# Altium PCB power-v3.1.PcbDoc (part 2 of 2)
Units mil, origin at the board's own origin, x right, y up, seen from the top; angles counter-clockwise.
Board outline 6120 x 3430.5 mil, 2 copper layers (Top Layer, Bottom Layer), stack 63.012 mil thick; 161 components, 68 nets, 413 pads, 6 vias.
Unrouted connection lines stored in the file: 242.
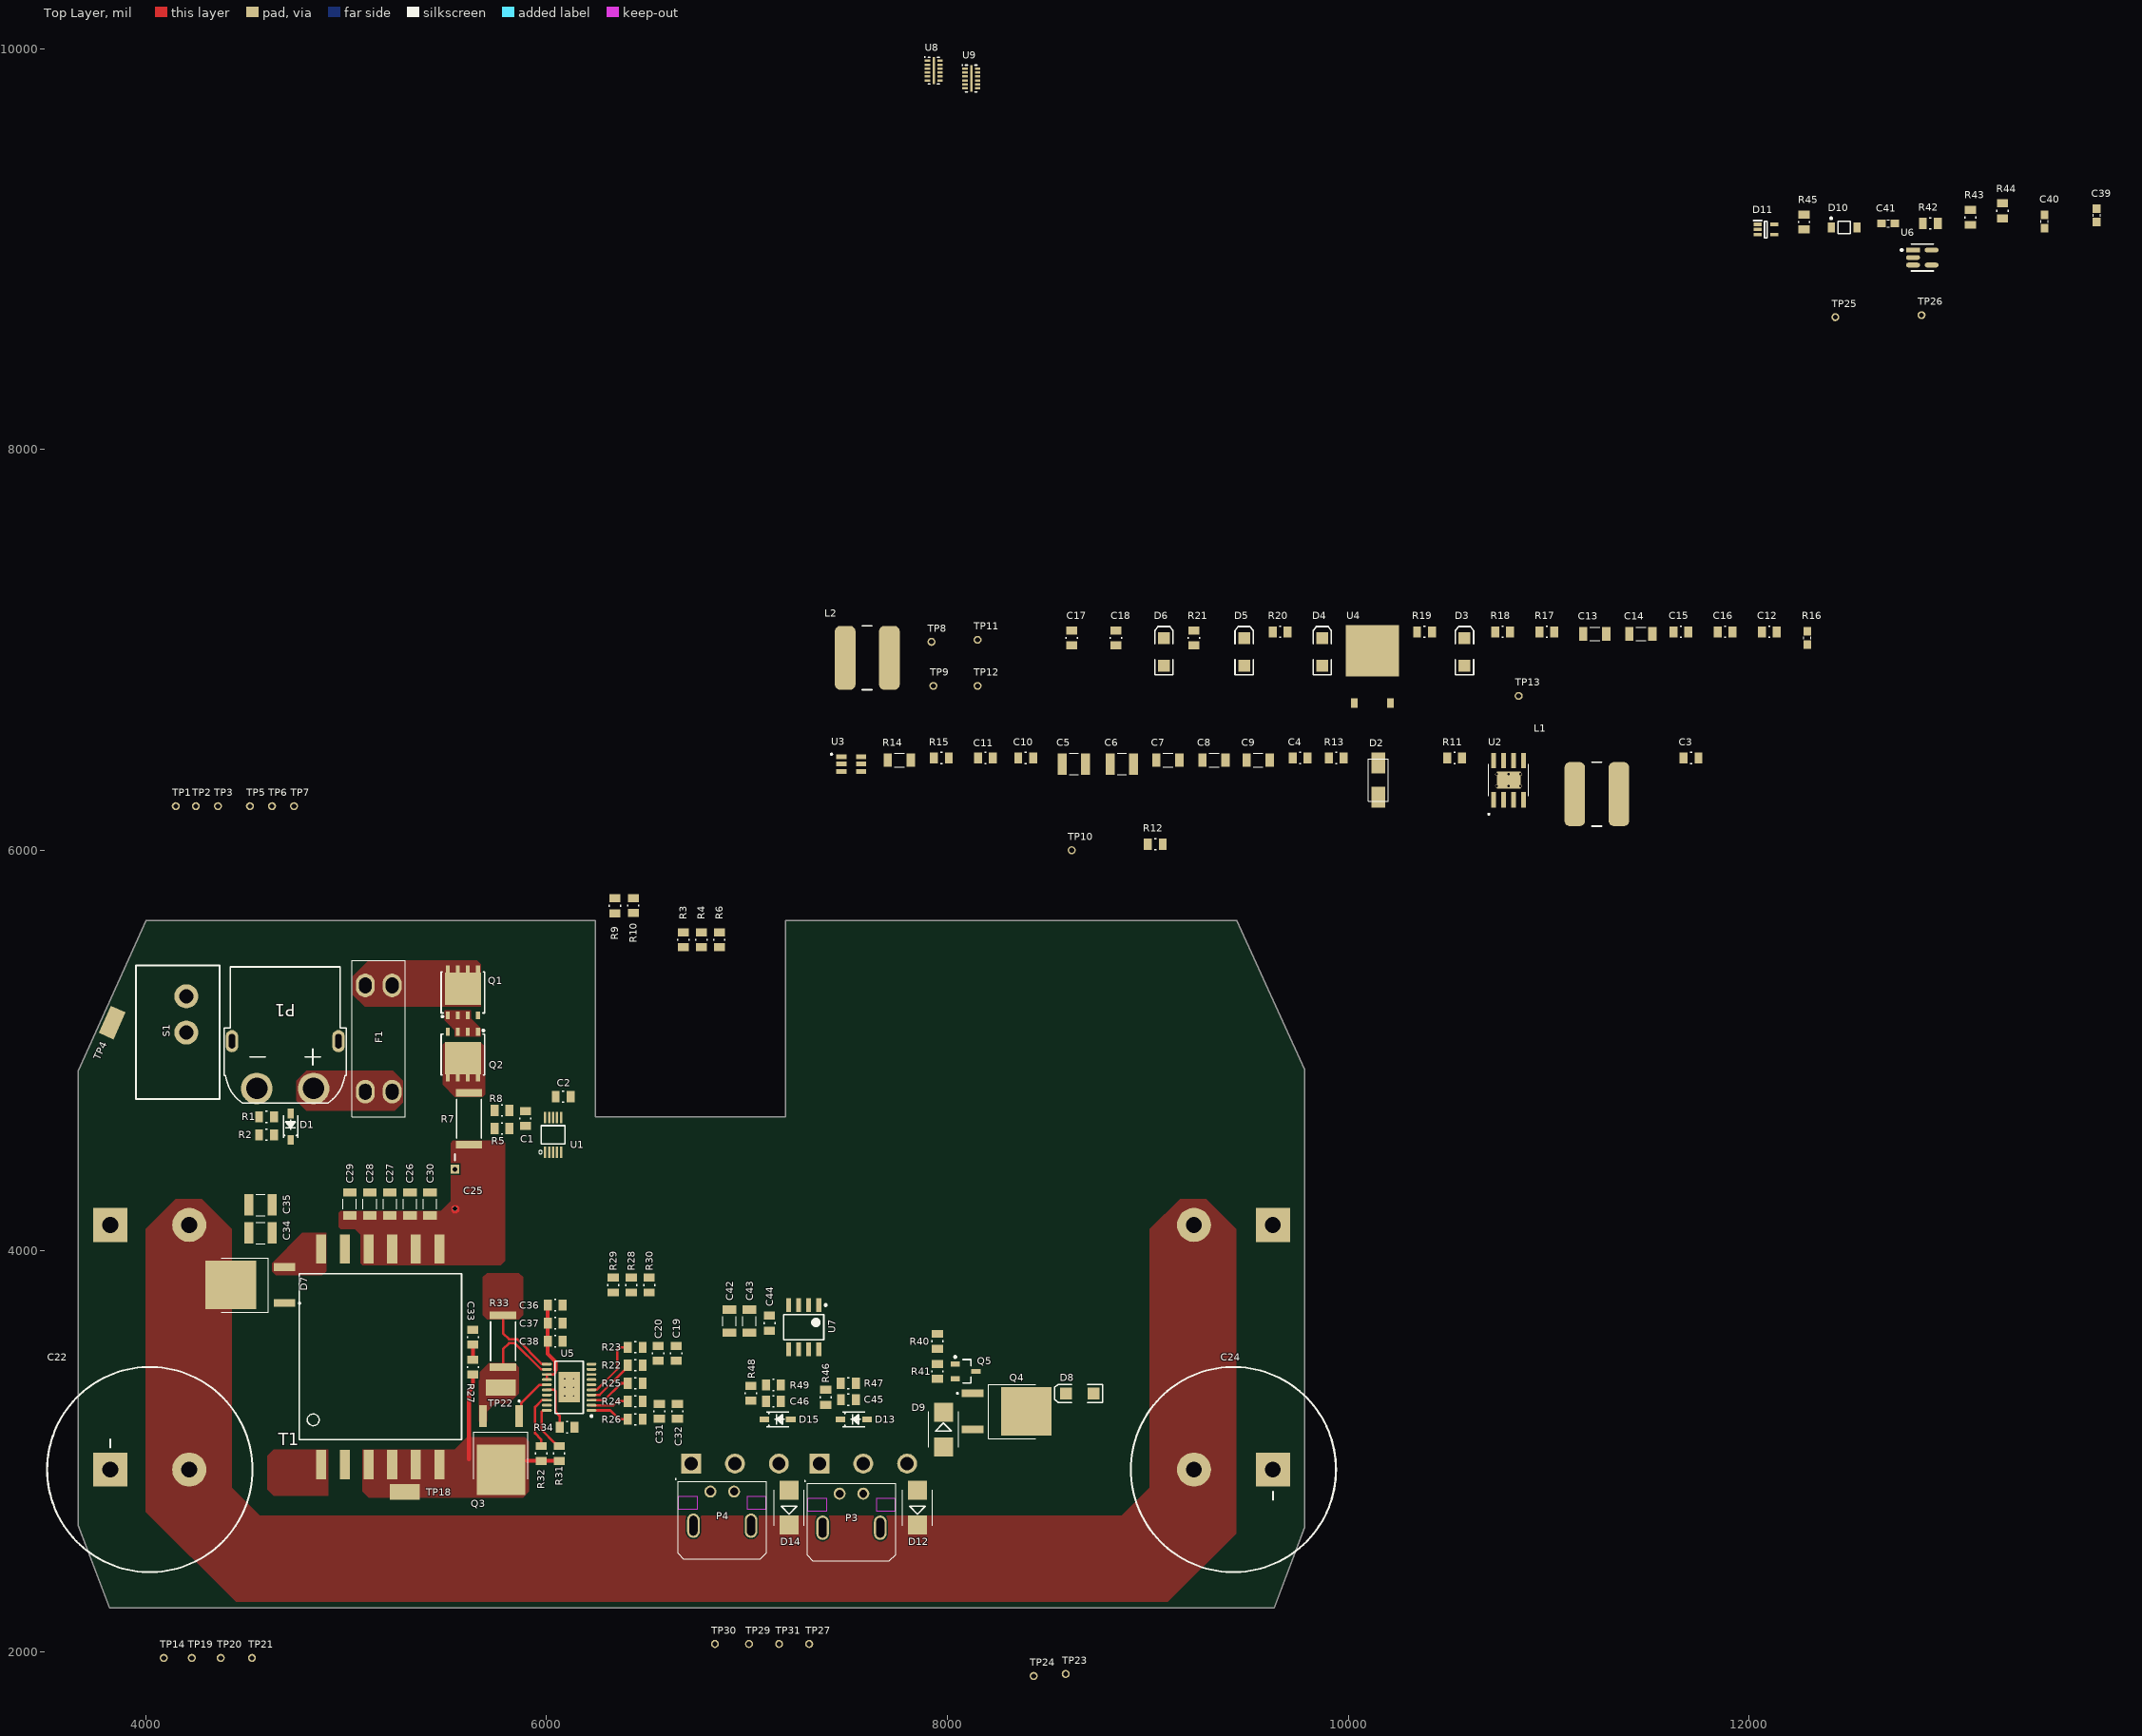
[diagram p0: Top Layer view]

## Part data (continued)
TP4 TP18 TP22: "PC Test Point, Miniature Phosphor Bronze, Silver Plating Surface Mount Mounting Type", Package="2010 Keystone", Digi-Key_Part_Number=36-5019CT-ND, Digi-Key_Purchase_URL=https://www.digikey.com/product-detail/en/keystone-electronics/5019/36-5019CT-ND/3907344?utm_source=snapeda&utm_medium=aggregator&utm_campaign=symbol, MF="Keystone Electronics", MP=5019
U1: library part "IC INA226AIDGSR", "36-V, Bi-Directional, Ultra-High Accuracy, Low-/High-Side, I2C Out Current/Power Monitor w/ Alert 10-VSSOP -40 to 125", Package="MSOP-10 Texas Instruments", Supplier Part Number 1=296-29034-6-ND, Digikey=296-29034-1-ND, Digikey Link=https://www.digikey.ca/product-detail/en/texas-instruments/INA226AIDGSR/296-29034-1-ND/2687118, MF="Texas Instruments", MP=INA226AIDGSR, Price=None, SnapEDA_Link=https://www.snapeda.com/parts/INA226AIDGSR/Texas%20Instruments/view-part/53552/?ref=snap, Supplier 1=Digi-Key
U2: "Buck Switching Regulator IC Positive Adjustable 0.8V 1 Output 5A 8-PowerSOIC _0.154, 3.90mm Width_", Package="SO-8 Texas Instruments", Supplier Part Number 1=296-36206-5-ND, MF="Texas Instruments", MP=TPS54531DDA, Price=None, SnapEDA_Link=https://www.snapeda.com/parts/TPS54531DDA/Texas%20Instruments/view-part/289535/?ref=snap, Supplier 1=Digi-Key
U3: "Buck Switching Regulator IC Positive Adjustable 0.76V 1 Output 3A SOT-23-6 Thin, TSOT-23-6", Package="TSOT-23 Texas Instruments", Supplier Part Number 1=296-43663-1-ND, Availability=Unavailable, MF="Texas Instruments", MP=TPS563200DDCR, Price=None, SnapEDA_Link=https://www.snapeda.com/parts/TPS563200DDCR/Texas%20Instruments/view-part/71685/?ref=snap, Supplier 1=Digi-Key
U4: "Linear Voltage Regulator IC Positive Fixed 1 Output  1A TO-252-3", Package=TO-252-3, Supplier Part Number 1=ZLDO1117K33DICT-ND, Digikey=ZLDO1117K33DIDKR-ND, Digikey Link=https://www.digikey.ca/product-detail/en/diodes-incorporated/ZLDO1117K33TC/ZLDO1117K33DIDKR-ND/2095639, MF="Diodes Incorporated", MP=ZLDO1117K33TC, Supplier 1=Digi-Key
U5: "Controller to 20-Pin TSSOP EP", Case/Package=TSSOP, Manufacturer="Analog Devices / Linear Technology", Max Input Voltage=24V, Max Operating Temperature=125°C, Min Operating Temperature=-40°C, Min Supply Voltage=4.75V, Operating Supply Current=5.5mA, Output Current=150mA, Output Voltage=500V, Package Quantity=74, Category="Voltage Regulators - Switching", ComponentLink1Description=https://datasheet.ciiva.com/15104/getdatasheetpartid-472813-15104438.pdf?src-supplier=Verical, ComponentLink1URL=https://datasheet.ciiva.com/15104/getdatasheetpartid-472813-15104438.pdf?src-supplier=Verical, ComponentLink2Description=https://datasheet.ciiva.com/31429/1692507-31429494.pdf?src-supplier=Farnell, ComponentLink2URL=https://datasheet.ciiva.com/31429/1692507-31429494.pdf?src-supplier=Farnell, ComponentLink3Description=https://datasheet.ciiva.com/1964/27024-1964843.pdf?src-supplier=Digi-Key, ComponentLink3URL=https://datasheet.ciiva.com/1964/27024-1964843.pdf?src-supplier=Digi-Key, Manufacturer Part Number=LT3751EFE#PBF, Max Supply Voltage=24V, Number of Outputs=1, Number of Pins=20, Packaging=Rail/Tube, Pricing 1="1=9.26000, 25=6.14640, 100=5.08200, 250=4.82792, 500=4.71900 (USD)", Radiation Hardening=No, REACH SVHC="No SVHC", RoHS=Yes, Stock 1=1231, Supplier 1=Digi-Key, Termination=SMD/SMT
U6: library part "OP AMP MIC7300YM5-TR", "IC OPAMP GP 1 CIRCUIT SOT23-5", Input Bias Current=0.0000005uA, Input Offset Voltage=1mV, Manufacturer=Microchip, Max Junction Temp=+85°C, Max Supply Voltage=10V, Min Supply Voltage=2.2V, Nominal Supply Current=0.7-1.5mA, Package=SOT23-5LD-PL-1, Supplier Part Number 1=576-1319-1-ND, Temperature="-40°C to +85°C", Temperature Range Low=-40°C, Voltage Gain=300-340V/mV, Automotive=No, Category=IC, ComponentLink2Description=Datasheet, ComponentLink2URL=http://www.microchip.com/mymicrochip/filehandler.aspx?ddocname=en580613, Device Class L1="Integrated Circuits (ICs)", Device Class L2="Linear ICs", Device Class L3="Amplifiers - Op Amps", Digikey Description="IC OPAMP GP 1 CIRCUIT SOT23-5", Footprint Url=https://ww1.microchip.com/downloads/en/PackagingSpec/00000049CH.pdf, Gain Bandwidth=0.55MHz, Height=1.45mm, Lead Free=Yes, Manufacturer Part Number=MIC7300YM5-TR, Mouser Description="Operational Amplifiers - Op Amps", Number Of Channels=1, Octopart=https://octopart.com/mic7300ym5-tr-microchip-66803593, RoHS=TRUE, Standoff Height=0mm, Supplier 1=Digi-Key, Temperature Range High=+85°C
U7: "Low-Side Gate Driver IC Non-Inverting 8-SOIC", Package="SOIC-8 Infineon", Supplier Part Number 1=IR4427SPBFCT-ND, Availability=Unavailable, MF="Infineon Technologies", MP=IR4427STRPBF, Price=None, SnapEDA_Link=https://www.snapeda.com/parts/IR4427STRPBF/Infineon%20Technologies/view-part/1815787/?ref=snap, Supplier 1=Digi-Key
U8 U9: library part "EMI FILTER TPD6F002DSVR", "6-Channel EMI Filter for Display Interface", Manufacturer="Texas Instruments", PACKAGE_DESIGNATOR=DSV, Copyright="Copyright (C) 2018 Accelerated Designs. All rights reserved", Datasheet_URL=http://www.ti.com/lit/gpn/TPD6F002, FAMILY_NAME="EMI Solution", GENERIC_PART_NUMBER=TPD6F002, INDUSTRY_STD_PKG_TYPE=SON, Manufacturer_Part_Number=TPD6F002DSVR, PIN_COUNT=12, RefDes=RefDes, Type=DEV, Vendor="Texas Instruments"

## Via types
v1: diameter 19.68, hole 7.87, Top Layer to Bottom Layer, 6 vias

## Nets (pads, with @x,y where several pads share a name; then routed paths per layer and width w, separated by ;. In a path a pad name is that pad's centre, name@x,y a point inside that pad or via, vN(x,y) a via of type N, cw(c..) or ccw(c..) an arc to the next point about the centre after c; other vN are vias at no path point)
3V3: C2.2 C18.1 C39.2 C40.1 R3.1 R4.1 R6.1 R18.1 TP13.1 U1.6 U4.2 U6.5
5V: C15.2 C16.2 C17.1 L2.2 R16.1 R19.1 TP11.1 U4.3
5V_VFB: R16.2 R17.2 TP12.1 U3.4
12V: C7.2 C8.2 C9.2 C13.2 C14.2 C19.2 C20.2 C36.1 C37.1 C38.1 C42.1 C43.1 C44.2 L1.2 R12.2 R20.1 R22.2 R23.2 R28.2 R29.2 TP9.1 U3.3 U3.5 U5.13 U5.14 U7.6 | length 425.1
  Top Layer w12: U5.14 U5.13 6001.53,3384.81 6035.38,3384.81 6043.62,3393.05 6043.62,3407.08
  Top Layer w20: C36.1 C37.1 C38.1 6005.41,3487.5 6043.62,3449.29 6043.62,3446.14 6043.8,3445.96 6043.8,3407.08 6043.62,3407.08
12V_EN: R11.2 R14.1 U2.3
12V_VSENSE: R12.1 R15.2 TP10.1 U2.5
+HV: C21.POS C22.POS C23.POS C24.POS C34.1 C35.1 D7.2 D12.C D14.C P3.1 P4.1 R35.2 R36.2 R38.2 R42.2
+VBAT: F1.1 F1.2 P1.2 TP1.1
A0_SEL: R10.1 U1.2
A1_SEL: R9.1 U1.1
CHIP_GATE: R46.2 R47.1 U7.7
GND: C2.1 C4.1 C5.1 C6.1 C7.1 C8.1 C9.1 C10.1 C11.1 C13.1 C14.1 C15.1 C16.1 C17.2 C18.2 C19.1 C20.1 C21.NEG C22.NEG C23.NEG C24.NEG C25.NEG C26.1 C27.1 C28.1 C29.1 C30.1 C31.1 C32.1 C34.2 C35.2 C36.2 C37.2 C38.2 C39.1 C40.2 C41.1 C42.2 C43.2 C44.1 C45.1 C46.1 D2.A D9.A D10.2 D11.2 D13.A D15.A P1.1 Q4.3 Q5.S Q6.3 Q7.3 R9.2 R10.2 R14.2 R15.1 R17.1 R30.1 R33.1 R34.2 R41.1 R45.2 R47.2 R49.2 S1.0 T1.1 TP4.1 U1.7 U2.7 U2.9 U2.V1 U2.V2 U2.V3 U2.V4 U2.V5 U2.V6 U3.1 U4.1 U5.9 U5.10 U5.11 U5.21 U6.2 U7.3 U8.13 U9.13 | length 372.7
  Top Layer w12: R33.1 5782.41,3590.5 5812.41,3560.5 5852.41,3560.5 5976.91,3435.99 6000.85,3435.99 U5.11
  other v1: 6090.76,3277.19 6134.07,3277.19 6090.76,3320.5 6134.07,3320.5 6090.76,3363.8 6134.07,3363.8
KICK_GATE: R48.2 R49.1 U7.5
NetC1_1: C1.1 R8.1 U1.10
NetC1_2: C1.2 R5.1 U1.9
NetC3_1: C3.1 U2.1
NetC3_2: C3.2 D2.C L1.1 U2.8
NetC4_2: C4.2 U2.4
NetC10_2: C10.2 R13.1 U2.6
NetC11_2: C11.2 R13.2
NetC12_1: C12.1 U3.6
NetC12_2: C12.2 L2.1 U3.2
NetC33_1: C33.1 R27.1 | length 76
  Top Layer w20: R27.1 C33.1
NetC45_2: C45.2 D13.C Q6.1 R46.1 TP27.1
NetC46_2: C46.2 D15.C Q7.1 R48.1 TP31.1
NetD1_A: D1.A Q1.G Q2.G R1.1
NetD1_C: D1.C Q1.S Q2.S R2.1
NetD3_1: D3.1 R18.2
NetD3_2: D3.2 D4.2 D5.2 D6.2
NetD4_1: D4.1 R19.2
NetD5_1: D5.1 R20.2
NetD6_1: D6.1 R21.2
NetD7_IN: D7.3 T1.12
NetD8_1: D8.1 R37.1
NetD8_2: D8.2 Q4.2 R38.1
NetD9_C: D9.C Q4.1 Q5.D R39.1 TP23.1
NetD10_1: D10.1 D11.1 TP26.1 U6.1 U6.4 U8.4
NetD11_3: D11.3 R44.1 R45.1 TP25.1 U6.3
NetD12_A: D12.A P3.2 Q6.2
NetD14_A: D14.A P4.2 Q7.2
NetF1_3: F1.3 F1.4 Q1.D TP2.1
NetQ3_D: Q3.2 R27.2 R31.1 R32.1 T1.3 T1.4 T1.5 T1.6 TP18.1 | length 726.4
  Top Layer w20: 5612.41,2961.97 5612.41,3300.5 5632.41,3320.5 R27.2 ; Q3.2@5772.41,2937.5 5788.41,2953.5 R32.1 R31.1
NetQ3_G: Q3.1 U5.15 | length 206.4
  Top Layer w12: Q3.1@5862.41,3205.5 5872.82,3215.9 5872.82,3240.9 5965.21,3333.29 U5.15
NetQ3_S: Q3.3 R33.2 TP22.1 U5.12 | length 375.3
  Top Layer w12: R33.2 5782.41,3510.5 5812.41,3540.5 5842.41,3540.5 5972.5,3410.4 6000.85,3410.4 U5.12
NetQ5_G: Q5.G R40.1 R41.2 TP24.1
NetR1_2: R1.2 R2.2 S1.1
NetR3_2: R3.2 TP6.1 U1.5 U9.2
NetR4_2: R4.2 TP5.1 U1.4 U9.3
NetR6_2: R6.2 TP7.1 U1.3 U9.1
NetR26_2: R26.2 U5.1 | length 200.4
  Top Layer w12: U5.1 6317.57,3205.34 6362.41,3160.5 R26.2
NetR28_1: R28.1 TP21.1 U5.6 U9.5
NetR29_1: R29.1 TP20.1 U5.7 U9.4
NetR30_2: R30.2 TP19.1 U5.8 U9.6
NetR31_2: R31.2 U5.20 | length 239.2
  Top Layer w12: U5.20 5982.99,3205.34 5975.96,3198.31 5975.96,3106.94 6040.91,3042 6040.91,3041.5 6054.91,3027.5 R31.2
NetR32_2: R32.2 U5.18 | length 280.5
  Top Layer w12: R32.2 5972.41,3060.5 5942.41,3090.5 5942.41,3222.88 5975.71,3256.18 6000.85,3256.18 U5.18
NetR34_1: R34.1 U5.16 | length 234.8
  Top Layer w12: U5.16 6001.53,3307.36 6037.44,3307.36 6044.47,3300.33 6044.47,3198.43 6065.41,3177.5 R34.1
NetR35_1: R35.1 R37.2
NetR36_1: R36.1 R39.2
NetR42_1: R42.1 R43.2
NetR43_1: R43.1 R44.2
NetTP29_1: TP29.1 U7.2 U8.2
NetTP30_1: TP30.1 U7.4 U8.1
OVLO1: R25.1 U5.3 | length 216.6
  Top Layer w12: U5.3 6288.44,3256.52 6372.41,3340.5 R25.1
OVLO2: R23.1 U5.5 | length 330.2
  Top Layer w12: U5.5 6223.97,3308.04 6249.96,3308.04 6352.41,3410.5 6352.41,3513.47 6359.44,3520.5 R23.1
UVLO1: R24.1 U5.2 | length 189.9
  Top Layer w12: U5.2 6332.84,3230.93 6352.41,3250.5 R24.1
UVLO2: R22.1 U5.4 | length 247.6
  Top Layer w12: U5.4 6223.97,3282.45 6264.37,3282.45 6390.91,3409 6391.41,3409 6405.41,3423 R22.1
VCC: C5.2 C6.2 C25.POS C26.2 C27.2 C28.2 C29.2 C30.2 C31.2 C32.2 C33.2 R5.2 R7.1 R11.1 R21.1 R24.2 R25.2 R26.1 R40.2 T1.7 T1.8 T1.9 T1.10 TP14.1 U2.2
VCC_RPP: Q2.D R7.2 R8.2 TP3.1 U1.8
pads on no net: C41.2 D7.1 D11.4 D11.5 P1.Un1 P1.Un2 P3.NC P4.NC R38.3 T1.2 T1.11 TP8.1 U5.17 U5.19 U7.1 U7.8 U8.3 U8.5 U8.6 U8.7 U8.8 U8.9 U8.10 U8.11 U8.12 U9.7 U9.8 U9.9 U9.10 U9.11 U9.12

## Polygon pours and split planes (outlines as drawn)
+HV on Top Layer "+HV_L01_P026" (solid, pour order 26): 9160,4260 9010,4110 9010,2820 8870,2680 6270,2680 6270,2250 9100,2250 9440,2590 9440,4110 9290,4260
+HV on Top Layer "+HV_L01_P024" (solid, pour order 24): 4280,4260 4430,4110 4430,2820 4570,2680 7170,2680 7170,2250 4450,2250 4000,2700 4000,4110 4150,4260
VCC on Top Layer "VCC_L01_P022" (solid, pour order 22): 5782.41,4550.5 5792.41,4540.5 5792.41,3950.5 5772.41,3930.5 5082.41,3930.5 5072.41,3940.5 5072.41,4080.5 5042.41,4110.5 4972.41,4110.5 4962.41,4120.5 4962.41,4190.5 4972.41,4200.5 5472.41,4200.5 5522.41,4250.5 5522.41,4540.5 5532.41,4550.5
NetD1_C on Top Layer "NETD1_C_L01_P020" (solid, pour order 20): 5492.41,5200.5 5622.41,5200.5 5622.41,5160.5 5672.41,5110.5 5672.41,5070.5 5542.41,5070.5 5542.41,5100.5 5492.41,5150.5
NetQ3_S on Top Layer "NETQ3_S_L01_P013" (solid, pour order 13): 5662.41,3150.5 5662.41,3390.5 5712.41,3440.5 5842.41,3440.5 5862.41,3420.5 5862.41,3290.5 5812.41,3240.5 5742.41,3240.5 5702.41,3200.5 5702.41,3150.5
NetQ3_D on Top Layer "NETQ3_D_L01_P008" (solid, pour order 8): 5082.41,3010.5 5542.41,3010.5 5602.41,3070.5 5892.41,3070.5 5912.41,3050.5 5912.41,2800.5 5882.41,2770.5 5112.41,2770.5 5082.41,2800.5
GND on Top Layer "GND_L01_P015" (solid, pour order 15): 5702.41,3660.5 5862.41,3660.5 5882.41,3680.5 5882.41,3870.5 5862.41,3890.5 5702.41,3890.5 5682.41,3870.5 5682.41,3680.5
GND on Top Layer "GND_L01_P016" (solid, pour order 16): 4910,3010 4638.09,3010 4607.59,2979.5 4607.59,2809.5 4637.09,2780 4910,2780
+VBAT on Top Layer "+VBAT_L01_P018" (solid, pour order 18): 5242.41,4700.5 4802.41,4700.5 4752.41,4750.5 4752.41,4850.5 4801.4,4899.48 5233.43,4899.48 5282.41,4850.5 5282.41,4740.5
NetF1_3 on Top Layer "NETF1_3_L01_P019" (solid, pour order 19): 5032.41,5370.5 5112.41,5450.5 5652.41,5450.5 5672.41,5430.5 5672.41,5220.5 5092.41,5220.5 5032.41,5280.5
VCC_RPP on Top Layer "VCC_RPP_L01_P021" (solid, pour order 21): 5492.41,5040.5 5672.41,5040.5 5692.41,5020.5 5692.41,4780.5 5682.41,4770.5 5542.41,4770.5 5482.41,4830.5 5482.41,5030.5
NetD7_IN on Top Layer "NETD7_IN_L01_P023" (solid, pour order 23): 4900,4090 4780,4090 4630,3940 4630,3900 4650,3880 4880,3880 4900,3900
GND on Bottom Layer "GND_L02_P029" (solid, pour order 29): 9480,4260 9410,4190 9410,2850 9240,2680 6590,2680 6590,2250 9360,2250 9750,2640 9750,4200 9690,4260
GND on Bottom Layer "GND_L02_P027" (solid, pour order 27): 3955,4255 4025,4185 4025,2845 4195,2675 6845,2675 6845,2245 4075,2245 3685,2635 3685,4195 3745,4255

## Silkscreen, mask and mechanical layers (free items; w line width, h text height)
Mechanical 1:
  circle w0.25: c3927.61,2749.95 r0.12
  circle w0.5: c4020,4130 r492.13
  circle w0.5: c9430,4130 r492.13
  lines w10: 3662.41,2631.16 3818.58,2220 9630,2220 9782.41,2621.28 9782.41,4905.08 9442.41,5650.5 7192.41,5650.5 7192.41,4670.5 6242.41,4670.5 6242.41,5650.5 4002.41,5650.5 3662.41,4899.48 3662.41,2631.16